# Altium PCB Probe-input.PcbDoc
Units mm, origin at the board's own origin, x right, y up, seen from the top; angles counter-clockwise.
Board outline 74.45 x 20 mm, 4 copper layers (Top, Ground, Signal/Power, Bottom), stack 1.516 mm thick; 16 components, 31 nets, 50 pads, 280 vias.
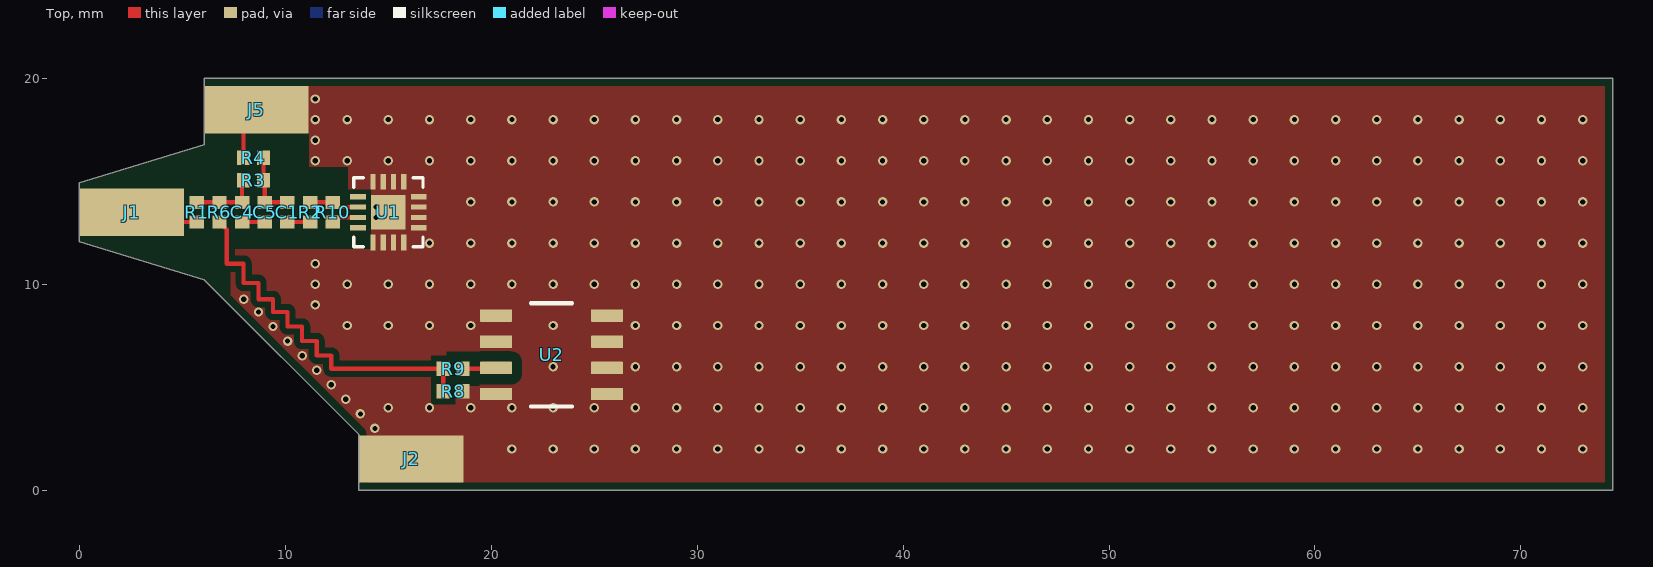
[diagram p0: Top view]
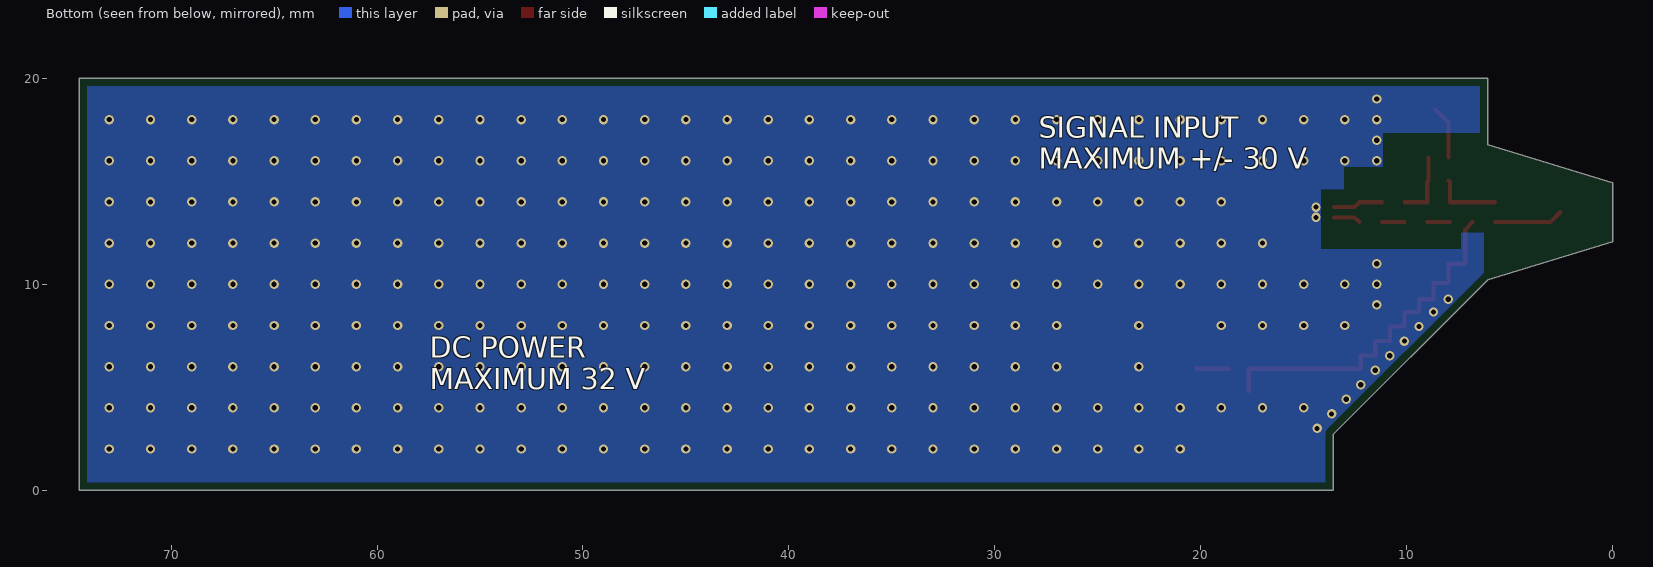
[diagram p1: Bottom view, seen from below]
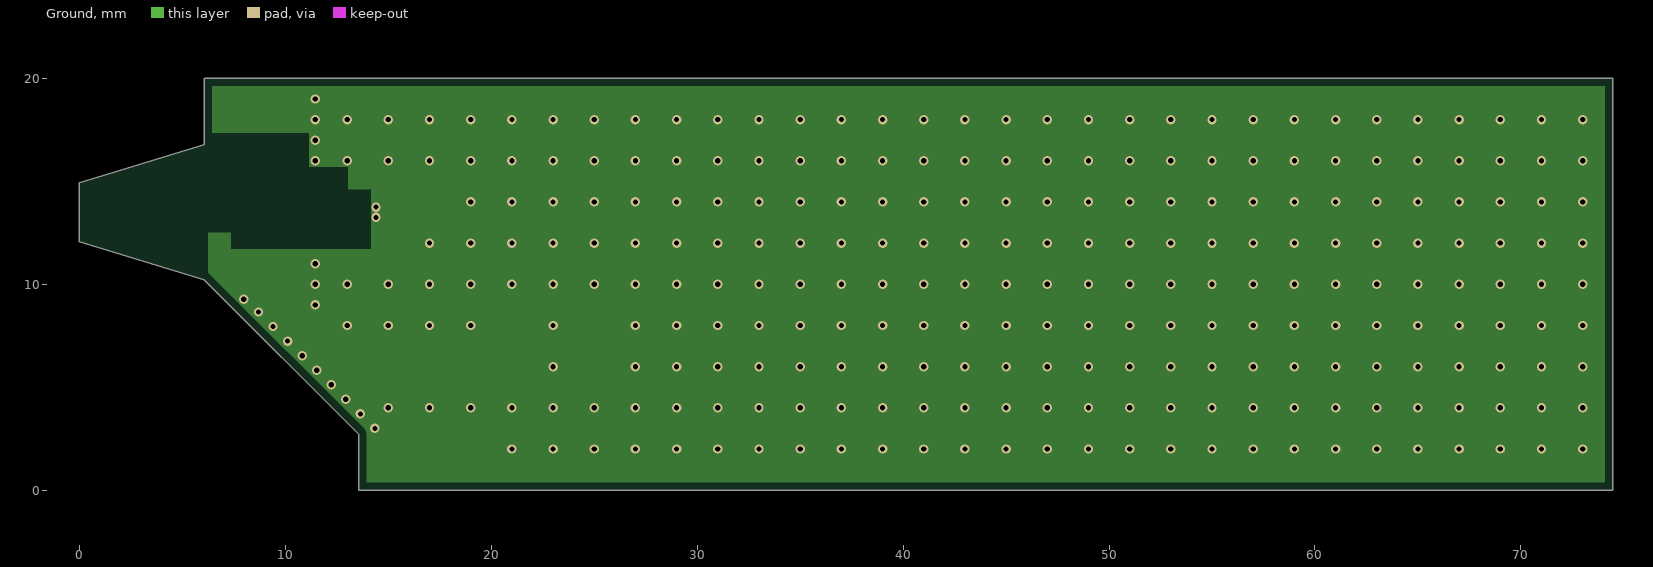
[diagram p2: Ground]
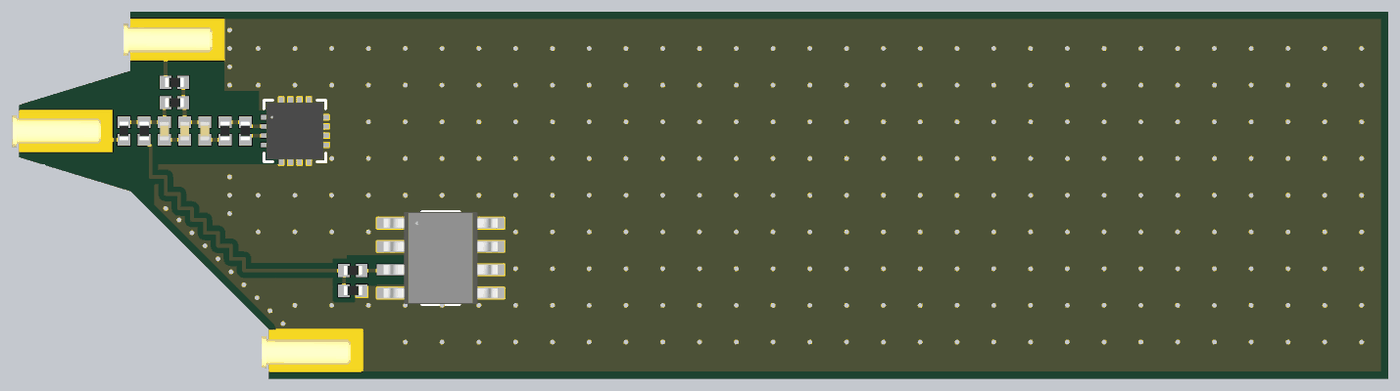
[diagram p3: 3D render of the assembled board from above, using the file's embedded part models]

## Layer stack, top to bottom
Top Solder: solder mask 0.0254, Solder Resist, Dk 3.5
Top: signal copper 0.0432
Dielectric 1: core 0.2022, FR-4, Dk 3.68
Ground: signal copper 0.0173
Dielectric 3: core 0.9906, Dk 3.68
Signal/Power: signal copper 0.0173
Dielectric 4: prepreg 0.2022, Dk 3.68
Bottom: signal copper 0.0432
Bottom Solder: solder mask 0.0254, Solder Resist, Dk 3.5

## Board outline
0,12.077 0,14.923 6.05,16.775 6.05,20 74.45,20 74.45,0 13.575,0 13.575,2.7 6.05,10.225

## Design rules (kind name [scope] priority, off if disabled: settings)
BoardOutlineClearance BoardOutlineClearance_outer [OnCopper and OnOutside] p1: gap=0.381 ignorepadtopadclearanceinfootprint=FALSE except(0: SMDPad-OutlineEdge)
BoardOutlineClearance BoardOutlineClearance_L3 [OnLayer('Signal/Power')] p2: gap=0.762 ignorepadtopadclearanceinfootprint=FALSE
BoardOutlineClearance BoardOutlineClearance_inner [OnCopper and not OnOutside] p3: gap=0.381 ignorepadtopadclearanceinfootprint=FALSE except(0: Fill-OutlineEdge Region-OutlineEdge)
Clearance Clearance_1 [InNet('NetR6_2') vs InNet('GND')] p1: gap=0.152 ignorepadtopadclearanceinfootprint=FALSE except(0.254: Fill-Fill Fill-Poly Fill-Region Poly-Poly Poly-Region Region-Region; 0.3: Arc-Fill Arc-Poly Arc-Region Track-Fill Track-Poly Track-Region SMDPad-Fill SMDPad-Poly SMDPad-Region)
Clearance Clearance_2 [InNet('NetR9_2') vs InNet('GND')] p2: gap=0.152 ignorepadtopadclearanceinfootprint=FALSE except(0.254: Fill-Fill Fill-Poly Fill-Region Poly-Poly Poly-Region Region-Region; 0.3: Arc-Fill Arc-Poly Arc-Region Track-Fill Track-Poly Track-Region; 0.5: SMDPad-Fill SMDPad-Poly SMDPad-Region)
Clearance [All] p3: gap=0.152 ignorepadtopadclearanceinfootprint=FALSE except(0.203: Arc-Poly Track-Poly SMDPad-Poly THPad-Poly Via-Poly; 0.254: Fill-Fill Fill-Poly Fill-Region Poly-Poly; 0.33: Arc-Hole Track-Hole SMDPad-Hole THPad-Hole Via-Hole Fill-Hole Poly-Hole Region-Hole)
HoleSize [All] p1: absolutevalues=TRUE maxlimit=6.35 minlimit=0.254 maxpercent=80.000 minpercent=20.000
MinimumAnnularRing [All] p1: minimumring=0.102
MinimumSolderMaskSliver [All] p1: minsoldermaskwidth=0.102
PlaneConnect [All] p1: planeconnectstyle=Direct reliefexpansion=0.508 reliefentries=4 reliefconductorwidth=0.254 reliefairgap=0.254
PolygonConnect PolygonConnect_1 [HasFootprint('901-10511-3') vs InNet('GND')] p1: connectstyle=Relief reliefconductorwidth=0.254 reliefentries=4 polygonreliefangle="90 Angle" airgapwidth=0.254
PolygonConnect [All] p2: thpad.connectstyle=Relief thpad.reliefconductorwidth=0.254 thpad.reliefentries=4 thpad.polygonreliefangle="90 Angle" thpad.airgapwidth=0.254 smdpad.connectstyle=Direct smdpad.reliefconductorwidth=0.254 smdpad.reliefentries=4 smdpad.polygonreliefangle="90 Angle" smdpad.airgapwidth=0.254 via.connectstyle=Direct via.reliefconductorwidth=0.254 via.reliefentries=4 via.polygonreliefangle="90 Angle" via.airgapwidth=0.254
RoutingVias [All] p1: holewidth=0.457 width=0.457 viastyle="Through Hole" minholewidth=0.203 minwidth=0.457 maxholewidth=0.711 maxwidth=1.27
SilkToSolderMaskClearance [IsPad] p1: minsilkscreentomaskgap=0.127 clearancetoexposedcopper=TRUE
SolderMaskExpansion [All] p1: expansion=0.051
Width [All] p1: maxlimit=5.08 minlimit=0.102 preferedwidth=0.254
26 further rules are at their usual default settings.

## Classes and differential pairs
component class Power: C6 C7 C11 C13 C14 C15 C20 C21 C? R22 R23 R? U3 U?

## Components (designator, comment, footprint, x,y, rotation, side; value= is the part's Value field where it differs from the comment)
C1 "330p" CAPC0402(1005)50_M 10.1,13.5 r270 top
C4 "1.2p" CAPC0402(1005)50_M 7.9,13.5 r270 top
C5 "1.2p" CAPC0402(1005)50_M 9,13.5 r90 top
J1 "0339-0-15-01-15-27-10-0" "MILL-MAX 0339"#1 0,13.5 r0 top
J2 "0339-0-15-01-15-27-10-0" "MILL-MAX 0339"#2 13.575,1.45 r0 top
J5 "0339-0-15-01-15-27-10-0" "MILL-MAX 0339"#1 6.05,18.476 r0 top
R1 "91" RESC0402(1005)_M 5.7,13.5 r90 top
R2 "33" RESC0402(1005)_M 11.2,13.5 r90 top
R3 "1.60M" RESC0402(1005)_M 8.45,15.05 r0 top
R4 "422K" RESC0402(1005)_M 8.45,16.15 r180 top
R6 "1.91M" RESC0402(1005)_M 6.8,13.5 r270 top
R8 "66.5k" RESC0402(1005)_M 18.15,4.8 r0 top value=66.5K
R9 "68" RESC0402(1005)_M 18.15,5.9 r0 top
R10 "10.0M" RESC0402(1005)_M 12.3,13.5 r270 top
U1 "BUF802" "VQFN16_RGT_TEX- OSHPARK" 15,13.5 r0 top
U2 "OPA140" SOIC-8 22.925,6.575 r0 top

## Footprints (in the part's own frame and the unit in brackets; to place one, negate y for a bottom-side part, rotate by r counter-clockwise, add the part's x,y. Pads: shape width x height; smd on the part's side, far side on the other; paste and mask are expansions set on the pad)
CAPC0402(1005)50_M [mm] "Chip Capacitor, Body 1.0x0.5mm, Height 0.5mm, IPC Low  Density"
  rect 0.635x0.7 smd: 1(-0.483,0) 2(0.483,0)
  body extent -0.5,-0.25 0.5,0.25, height 0.5
"MILL-MAX 0339"#1 [mil] "MILL-MAX 0339"
  rect 200x90 smd paste-1000: 1(100,0)
  body extent -15,-34 175,34, height 61
"MILL-MAX 0339"#2 [mil] "MILL-MAX 0339"
  rect 200x90 smd paste-1000: 1(100,2.91)
  body extent -15,-34 175,34, height 61
RESC0402(1005)_M [mm] "Chip Resistor, Body 1.0x0.5mm, IPC Low Density"
  rect 0.635x0.7 smd: 1(-0.483,0) 2(0.482,0)
  body extent -0.5,-0.25 0.5,0.25, height 0.35
SOIC-8 [mm] "SOIC-8"
  rrect8% 1.55x0.6 smd: 1(-2.7,1.905) 2(-2.7,0.635) 3(-2.7,-0.635) 4(-2.7,-1.905) 5(2.7,-1.905) 6(2.7,-0.635) 7(2.7,0.635) 8(2.7,1.905)
  silkscreen extent -1,-2.5 1,2.5, body extent -3.1,-2.5 3.1,2.5, height 1.76
"VQFN16_RGT_TEX- OSHPARK" [mil]
  rect 30x10 smd: 1(-58,29.53) 2(-58,9.84) 3(-58,-9.85) 4(-58,-29.54) 9(58,-29.54) 10(58,-9.85) 11(58,9.84) 12(58,29.53)
  rect 10x30 smd: 5(-29.53,-58) 6(-9.85,-58) 7(9.85,-58) 8(29.53,-58) 13(29.53,58) 14(9.85,58) 15(-9.85,58) 16(-29.53,58)
  rect 66.14x66.14 smd: 17(0,0)
  silkscreen extent -66,-66 66,66, body extent -61,-61 61,61, height 39

## Part data
C1: library part GRM1555C1H331JA01, "CAP CER 330PF±5% 50V C0G 0402", Capacitance=330pF, Manufacturer=Murata, Manufacturer Part Number=GRM1555C1H331JA01D, Temperature Coefficient=C0G, Tolerance=±5%, Part Number=GRM1555C1H331JA01
C4 C5: library part GJM1555C1H1R2WB01, "CAP CER 1.2PF±0.05PF 50V C0G/NP0 0402", Capacitance=1.2pF, Manufacturer=Murata, Manufacturer Part Number=GJM1555C1H1R2WB01D, Temperature Coefficient=C0G, Tolerance=±0.05pF, Part Number=GJM1555C1H1R2WB01
J1 J2 J5: "CONN PIN RCPT", Manufacturer=Mill-Max, Max Operating Temperature=125°C, Min Operating Temperature=-55°C, Supplier Part Number 1=0339-0-15-01-15-27-10-0-ND, ComponentLink1Description=https://www.mill-max.com/assets/pdfs/172.pdf?src-supplier=Digi-Key, ComponentLink1URL=https://www.mill-max.com/assets/pdfs/172.pdf?src-supplier=Digi-Key, ComponentLink2Description=https://datasheet.octopart.com/0339-0-15-01-15-27-10-0-Mill-Max-datasheet-26446830.pdf?src-supplier=Future+Electronics, ComponentLink2URL=https://datasheet.octopart.com/0339-0-15-01-15-27-10-0-Mill-Max-datasheet-26446830.pdf?src-supplier=Future+Electronics, ComponentLink3Description=http://www.mouser.com/ds/2/273/172M-276194.pdf?src-supplier=Mouser, ComponentLink3URL=http://www.mouser.com/ds/2/273/172M-276194.pdf?src-supplier=Mouser, ComponentLink4Description=https://datasheet.octopart.com/0339-0-15-01-15-27-10-0-Mill-Max-datasheet-155663258.pdf?src-supplier=Sager+Electronics, ComponentLink4URL=https://datasheet.octopart.com/0339-0-15-01-15-27-10-0-Mill-Max-datasheet-155663258.pdf?src-supplier=Sager+Electronics, Contact Material=Copper, Contact Plating=Gold, Manufacturer Part Number=0339-0-15-01-15-27-10-0, Packaging=Bulk, Pricing 1="1=1.42, 10=1.234, 25=1.1812, 50=1.155, 100=1.1025, 250=0.99748, 500=0.91874, 1000=0.7875, 2500=0.735 (USD)", RoHS Compliant=No, Series=0339, Stock 1=989, Supplier 1=Digi-Key, Supplier 2=Mouser, Supplier Part Number 2=575-0339015011527100, Termination=Solder
R1: library part RESC0402-91R0-1pct, "RES 91 OHM 1% 1/16W 0402", Manufacturer 1=Yageo, Manufacturer 2="Stackpole Electronics", Manufacturer 3="Vishay Dale", Manufacturer 4="Panasonic Electronic Components", Manufacturer Part Number 1=RC0402FR-0791RL, Manufacturer Part Number 2=RMCF0402FT91R0, Manufacturer Part Number 3=CRCW040291R0FKED, Manufacturer Part Number 4=ERJ-2RKF91R0X, Ohms=91, Part Number=RESC0402-91R0-1pct
R2: library part RESC0402-33R0-1pct, "RES 33 OHM 1% 1/16W 0402", Manufacturer 1=Yageo, Manufacturer 2="Stackpole Electronics", Manufacturer 3="Vishay Dale", Manufacturer 4="Panasonic Electronic Components", Manufacturer Part Number 1=RC0402FR-0733RL, Manufacturer Part Number 2=RMCF0402FT33R0, Manufacturer Part Number 3=CRCW040233R0FKED, Manufacturer Part Number 4=ERJ-2RKF33R0X, Ohms=33, Part Number=RESC0402-33R0-1pct
R3: library part RESC0402-1M60-1pct, "RES 1.60M OHM 1% 1/16W 0402", Manufacturer 1=Yageo, Manufacturer 2="Stackpole Electronics", Manufacturer 3="Vishay Dale", Manufacturer 4="Panasonic Electronic Components", Manufacturer Part Number 1=RC0402FR-071M6L, Manufacturer Part Number 2=RMCF0402FT1M60, Manufacturer Part Number 3=CRCW04021M60FKED, Ohms=1600000, Part Number=RESC0402-1M60-1pct
R4: library part RESC0402-422K-1pct, "RES 422K OHM 1% 1/16W 0402", Manufacturer 1=Yageo, Manufacturer 2="Stackpole Electronics", Manufacturer 3="Vishay Dale", Manufacturer 4="Panasonic Electronic Components", Manufacturer Part Number 1=RC0402FR-07422KL, Manufacturer Part Number 2=RMCF0402FT422K, Manufacturer Part Number 3=CRCW0402422KFKED, Manufacturer Part Number 4=ERJ-2RKF4223X, Ohms=422000, Part Number=RESC0402-422K-1pct
R6: library part RESC0402-1M91-1pct, "RES 1.91M OHM 1% 1/16W 0402", Manufacturer 1=Yageo, Manufacturer 2="Stackpole Electronics", Manufacturer 3="Vishay Dale", Manufacturer 4="Panasonic Electronic Components", Manufacturer Part Number 1=RC0402FR-071M91L, Manufacturer Part Number 2=RMCF0402FT1M91, Manufacturer Part Number 3=CRCW04021M91FKED, Ohms=1910000, Part Number=RESC0402-1M91-1pct
R8: library part RESC0402-66K5-1pct, "RES 66.5K OHM 1% 1/16W 0402", Manufacturer 1=Yageo, Manufacturer 2="Stackpole Electronics", Manufacturer 3="Vishay Dale", Manufacturer 4="Panasonic Electronic Components", Manufacturer Part Number 1=RC0402FR-0766K5L, Manufacturer Part Number 2=RMCF0402FT66K5, Manufacturer Part Number 3=CRCW040266K5FKED, Manufacturer Part Number 4=ERJ-2RKF6652X, Ohms=66500, Part Number=RESC0402-66K5-1pct
R9: library part RESC0402-68R0-1pct, "RES 68 OHM 1% 1/16W 0402", Manufacturer 1=Yageo, Manufacturer 2="Stackpole Electronics", Manufacturer 3="Vishay Dale", Manufacturer 4="Panasonic Electronic Components", Manufacturer Part Number 1=RC0402FR-0768RL, Manufacturer Part Number 2=RMCF0402FT68R0, Manufacturer Part Number 3=CRCW040268R0FKED, Manufacturer Part Number 4=ERJ-2RKF68R0X, Ohms=68, Part Number=RESC0402-68R0-1pct
R10: library part RESC0402-10M0-1pct, "RES 10.0M OHM 1% 1/16W 0402", Manufacturer 1=Yageo, Manufacturer 2="Stackpole Electronics", Manufacturer 3="Vishay Dale", Manufacturer 4="Panasonic Electronic Components", Manufacturer Part Number 1=RC0402FR-0710ML, Manufacturer Part Number 2=RMCF0402FT10M0, Manufacturer Part Number 3=CRCW040210M0FKED, Ohms=10000000, Part Number=RESC0402-10M0-1pct
U1: library part BUF802IRGTR, "WIDE-BANDWIDTH JFET BUFFER", Manufacturer="Texas Instruments", Supplier Part Number 1=296-BUF802IRGTRCT-ND, Manufacturer Part Number=BUF802IRGTR, Pricing 1="1=5.06, 10=4.541, 25=4.2928, 100=3.7206, 250=3.5298, 500=3.16728, 1000=2.88 (USD)", Stock 1=1253, Supplier 1=Digi-Key, Supplier 2=Mouser, Supplier Part Number 2=595-BUF802IRGTR
U2: library part OPA140AIDR, "IC OPAMP JFET 1 CIRCUIT 8SOIC", Case/Package=D, Input Bias Current=10pA, Input Offset Voltage (Vos)=30uV, Manufacturer="Texas Instruments", Max Dual Supply Voltage=18V, Max I/O Voltage=120uV, Max Operating Temperature=125°C, Max Supply Voltage=36V, Min Dual Supply Voltage=2.25V, Min Operating Temperature=-40°C, Min Supply Voltage=4.5V, Nominal Supply Current=2mA, Operating Supply Current=1.8mA, Output Current=36mA, Package Quantity=2500, Power Supply Rejection Ratio (PSRR)=140dB, Supplier Part Number 1=296-43606-6-ND, Voltage Gain=126dB, Common Mode Rejection Ratio=126dB, ComponentLink1Description=https://datasheet.ciiva.com/14459/sbos498a-14459066.pdf?src-supplier=Avnet, ComponentLink1URL=https://datasheet.ciiva.com/14459/sbos498a-14459066.pdf?src-supplier=Avnet, ComponentLink2Description=https://datasheet.ciiva.com/1815/opa140-1815515.pdf?src-supplier=Digi-Key, ComponentLink2URL=https://datasheet.ciiva.com/1815/opa140-1815515.pdf?src-supplier=Digi-Key, Contact Plating=Gold, Gain Bandwidth Product=11MHz, Lead Free="Lead Free", Manufacturer Part Number=OPA140AIDR, Nominal Gain Bandwidth Product=11MHz, Number of Channels=1, Number of Circuits=1, Number of Elements=1, Number of Pins=8, Operating Supply Voltage=18V, Output Current per Channel=36mA, Packaging="Tape and Reel", Pricing 1="1=4.01, 10=3.606, 25=3.4088, 100=2.9542, 250=2.80276, 500=2.5149, 1000=2.121 (USD)", Radiation Hardening=No, RoHS Compliant=Yes, Series=-, Slew Rate=20V/µs, Stock 1=3434, Supplier 1=Digi-Key, Supplier 2=Mouser, Supplier Part Number 2=595-OPA140AIDR, Supply Current=2mA, Technology=BIFET, Unity Gain Bandwidth Product=11MHz

## Via types
v1: diameter 0.457, hole 0.254, Top to Bottom, tented both sides, 280 vias

## Nets (pads, with @x,y where several pads share a name; then routed paths per layer and width w, separated by ;. In a path a pad name is that pad's centre, name@x,y a point inside that pad or via, vN(x,y) a via of type N, cw(c..) or ccw(c..) an arc to the next point about the centre after c; other vN are vias at no path point)
GND: J2.1 J5.1 R4.2 R8.2 U1.5 U1.6 U1.7 U1.8 U1.9 U1.10 U1.11 U1.12 U1.13 U1.14 U1.15 U1.16 U1.17 U2.1 U2.2 U2.4 U2.5 U2.6 U2.7 U2.8 | length 2.6
  Top w0.2: R4.2 7.967,17.853 J5.1
  other v1: 21,2 23,2 25,2 27,2 29,2 31,2 33,2 35,2 37,2 39,2 41,2 43,2 45,2 47,2 49,2 51,2 53,2 55,2 57,2 59,2 61,2 63,2 65,2 67,2 69,2 71,2 73,2 14.35,3 13.643,3.707 15,4 17,4 19,4 21,4 23,4 25,4 27,4 29,4 31,4 33,4 35,4 37,4 39,4 41,4 43,4 45,4 47,4 49,4 51,4 53,4 55,4 57,4 59,4 61,4 63,4 65,4 67,4 69,4 71,4 73,4 12.936,4.414 12.229,5.121 11.522,5.828 23,6 27,6 29,6 31,6 33,6 35,6 37,6 39,6 41,6 43,6 45,6 47,6 49,6 51,6 53,6 55,6 57,6 59,6 61,6 63,6 65,6 67,6 69,6 71,6 73,6 10.814,6.536 10.107,7.243 9.4,7.95 13,8 15,8 17,8 19,8 23,8 27,8 29,8 31,8 33,8 35,8 37,8 39,8 41,8 43,8 45,8 47,8 49,8 51,8 53,8 55,8 57,8 59,8 61,8 63,8 65,8 67,8 69,8 71,8 73,8 8.693,8.657 11.45,9 7.975,9.275 11.45,10 13,10 15,10 17,10 19,10 21,10 23,10 25,10 27,10 29,10 31,10 33,10 35,10 37,10 39,10 41,10 43,10 45,10 47,10 49,10 51,10 53,10 55,10 57,10 59,10 61,10 63,10 65,10 67,10 69,10 71,10 73,10 11.45,11 17,12 19,12 21,12 23,12 25,12 27,12 29,12 31,12 33,12 35,12 37,12 39,12 41,12 43,12 45,12 47,12 49,12 51,12 53,12 55,12 57,12 59,12 61,12 63,12 65,12 67,12 69,12 71,12 73,12 14.4,13.25 14.4,13.75 19,14 21,14 23,14 25,14 27,14 29,14 31,14 33,14 35,14 37,14 39,14 41,14 43,14 45,14 47,14 49,14 51,14 53,14 55,14 57,14 59,14 61,14 63,14 65,14 67,14 69,14 71,14 73,14 11.45,16 13,16 15,16 17,16 19,16 21,16 23,16 25,16 27,16 29,16 31,16 33,16 35,16 37,16 39,16 41,16 43,16 45,16 47,16 49,16 51,16 53,16 55,16 57,16 59,16 61,16 63,16 65,16 67,16 69,16 71,16 73,16 11.45,17 11.45,18 13,18 15,18 17,18 19,18 21,18 23,18 25,18 27,18 29,18 31,18 33,18 35,18 37,18 39,18 41,18 43,18 45,18 47,18 49,18 51,18 53,18 55,18 57,18 59,18 61,18 63,18 65,18 67,18 69,18 71,18 73,18 11.45,19
NetC1_1: C1.1 C5.2 R3.2 R4.1 | length 3.3
  Top w0.2: R4.1 R3.2 9,14.983 C5.2 C1.1
NetC1_2: C1.2 R2.1 | length 1.1
  Top w0.2: C1.2 R2.1
NetC2_1: 
NetC2_2: 
NetC3_1: 
NetC4_1: C4.1 R1.2 R3.1 R6.1 | length 3.3
  Top w0.2: R1.2 R6.1 C4.1 7.9,14.983 R3.1
NetC4_2: C4.2 C5.1 | length 1.1
  Top w0.2: C4.2 C5.1
NetC6_1: 
NetC7_1: 
NetC7_2: 
NetC8_1: 
NetC9_1: 
NetD1_1: 
NetD2_1: 
NetR2_2: R2.2 R10.1 U1.2 | length 2.4
  Top w0.2: R2.2 R10.1 12.533,13.75 U1.2
NetR6_2: R6.2 R8.1 R9.1 | length 18.9
  Top w0.2: R6.2 7.15,12.668 7.15,11 7.975,11 7.975,10.071 8.693,10.071 8.693,9.275 9.4,9.275 9.4,8.657 10.107,8.657 10.107,7.95 10.814,7.95 10.814,7.243 11.522,7.243 11.522,6.536 12.229,6.536 12.229,5.9 R9.1 R8.1
NetR9_2: R9.2 U2.3 | length 1.6
  Top w0.2: R9.2 20.185,5.9 U2.3
NetR10_2: R10.2 U1.3 | length 1.3
  Top w0.2: R10.2 12.532,13.25 U1.3
NetR11_2: 
NetR12_2: 
NetR16_1: 
NetR17_1: 
NetR18_1: 
NetR23_2: 
OUT: 
TIP: J1.1 R1.1 | length 3.4
  Top w0.2: J1.1 3.022,13.018 R1.1
V+: 
V-: 
VDD: 
VSS: 
pads on no net: U1.1 U1.4

## Polygon pours and split planes (outlines as drawn)
GND on Bottom "GND_L04_P070" (solid, pour order 70): 13.05,14.625 14.162,14.625 14.162,11.7 7.35,11.7 7.35,12.5 6.25,12.5 6.25,0 11.033,0 74.45,0 74.45,20 11.125,20 6.05,20 6.05,17.35 11.15,17.35 11.15,15.7 13.05,15.7
GND on Ground "GND_L02_P074" (solid, pour order 74): 6.05,17.35 11.15,17.35 11.15,15.7 13.05,15.7 13.05,14.625 14.16,14.625 14.16,11.7 7.35,11.7 7.35,12.5 6.25,12.5 6.25,0 74.45,0 74.45,20 11.2,20 6.05,20
GND on Top "GND_L01_P066" (solid, pour order 66): 7.35,0 74.45,0 74.45,20 11.05,20 6.05,20 6.05,17.35 11.15,17.35 11.15,15.7 13.05,15.7 13.05,11.7 7.35,11.7

## Other copper
Top:
  pour cut-out: 12.892,14.625 12.892,11.7 14.16,11.7 14.16,14.625

## Silkscreen, mask and mechanical layers (free items; w line width, h text height)
Bottom Overlay:
  text "SIGNAL INPUT / MAXIMUM +/- 30 V" at 27.875,15.6 h1.02
  text "DC POWER / MAXIMUM 32 V" at 57.45,4.9 h1.02
Mechanical 1:
  lines w0.1: 74.45,0 13.575,0 13.575,2.7 6.05,10.225 0,12.077 0,14.923 6.05,16.775 6.05,20 74.45,20

## Text inside footprints (layer, text, board x,y; h text height)
U1: Mechanical 8 "*" at 12.193,13.865 h1.27